# EAGLE board suppport_sharp (EAGLE 6.4)
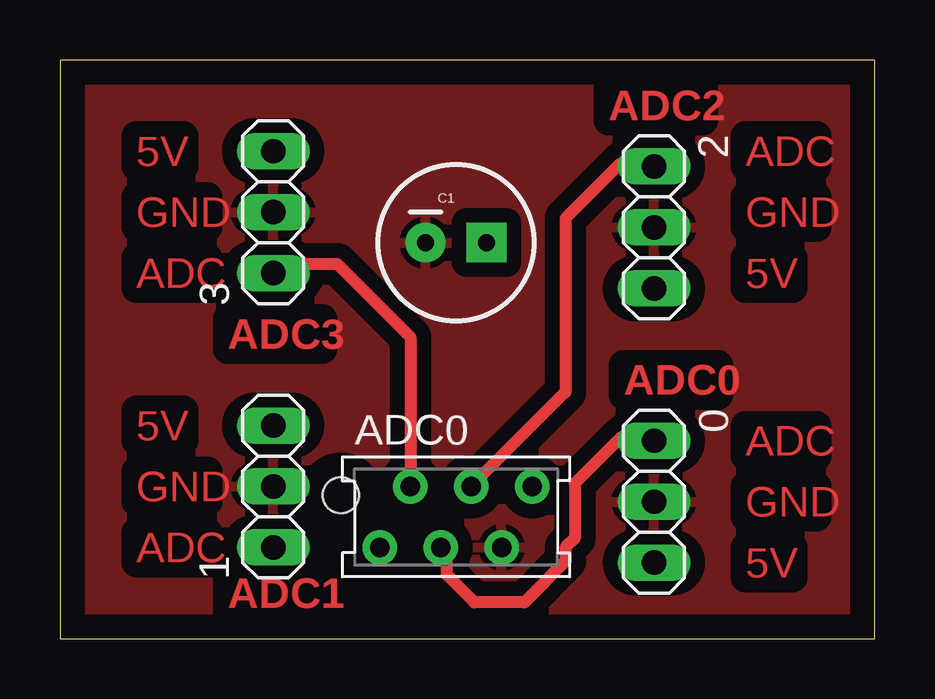
[diagram p0: board, top side]
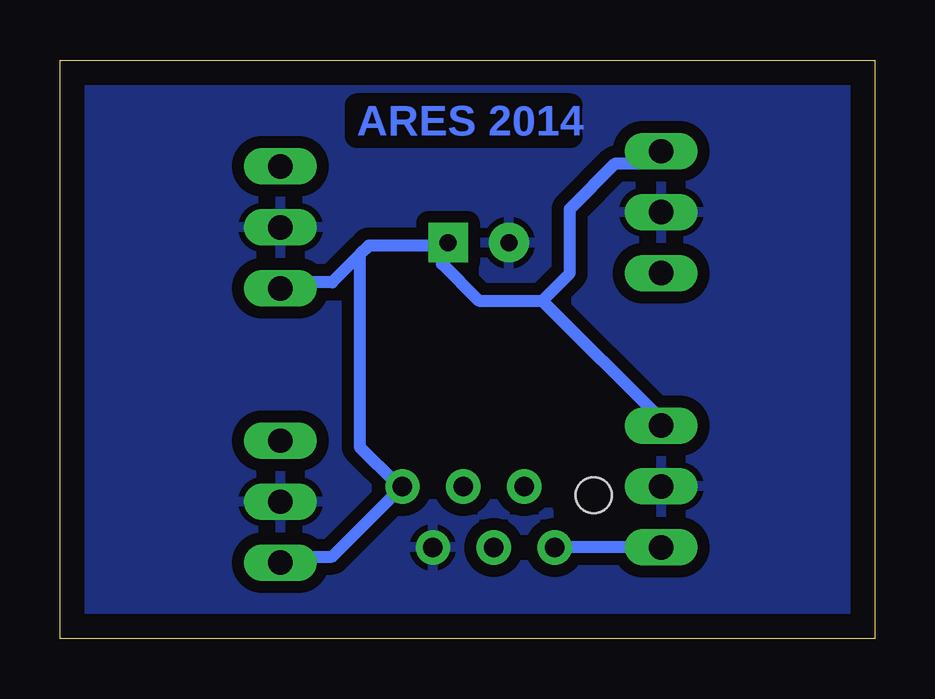
[diagram p1: board, bottom side, seen from below]

Size 33.96 x 24.12 mm. Coordinates in mm from the lower left corner, seen from the top.
Outline: 0,0 33.96,0 33.96,24.12 0,24.12 0,0
Copper layers (1*16): Top 0.1mm / dielectric 1.5mm / Bottom 0.1mm
Design rules "ensea": minimum track width 0.5mm, minimum drill 0.5mm, track to track 0.5mm, track to pad 0.5mm, pad to pad 0.5mm, via to via 0.5mm, smd to smd 8mil, copper to edge 40mil, drill to drill 8mil, minimum pad ring 10mil, minimum via ring 8mil, stop-mask expansion 4mil, vias tented up to drill 0mil, thermal gap 10mil
Net classes: 1 +5V: width 0.6 mm, drill 0.2 mm, clearance 0.4 mm

## Footprints (pad centres in the part's own frame; a part is rotated, then mirrored left to right if it is on the bottom)
1X03 = drill 1.016 long: 1 -2.54,0; 2 0,0; 3 2.54,0
AMP-215079-6 = drill 0.8 pad 1.422: 1 0,0; 2 1.27,2.54; 3 2.54,0; 4 3.81,2.54; 5 5.08,0; 6 6.35,2.54 | hole 1.5: -1.62,2.175
CPOL-RADIAL-100UF-25V = drill 0.7 pad 1.651 square: 1 1.27,0 | drill 0.7 pad 1.651: 2 -1.27,0

## Placement (x,y rotation side)
0  [1X03]  24.77,5.71 270 top
1  [1X03]  8.89,6.35 90 top
2  [1X03]  24.77,17.14 270 top
3  [1X03]  8.89,17.78 90 top
ADC0  MMATCH-6-  [AMP-215079-6]  13.34,3.81 0 top
C1  [CPOL-RADIAL-100UF-25V]  16.51,16.51 0 top

## Library data of the parts
0 1-3 = pinhead
ADC0 = jt-con-micromatch
C1 = SparkFun-Passives

## Nets
ADC_0: 0.1 ADC0.3
ADC_1: 1.1 ADC0.1
ADC_2: 2.1 ADC0.4
ADC_3: 3.1 ADC0.2
GND: 0.2 1.2 2.2 3.2 ADC0.5 C1.2
VCC: 0.3 1.3 2.3 3.3 ADC0.6 C1.1

## Tracks (layer width: path | path; a pad name or v marks a point on that pad's centre or on a via)
ADC_0
  Top 0.5: ADC0.3 16.13,3.81 16.13,2.67 17.27,1.52 19.36,1.52 21.08,3.25 21.08,3.81 21.46,4.19 21.46,6.48 23.37,8.38 24.51,8.38 0.1
ADC_1
  Bottom 0.5: 1.1 ADC0.1
ADC_2
  Top 0.5: ADC0.4 21.08,10.29 21.08,17.53 23.37,19.81 24.51,19.81 2.1
ADC_3
  Top 0.5: ADC0.2 14.61,12.57 11.56,15.62 8.89,15.62 3.1
GND
  pour Bottom: -3.18,27.94 35.56,26.67 32.38,-5.71 -3.81,-5.08
  pour Top (isolate 0.61): -3.81,29.84 -5.71,-6.35 33.66,-6.35 35.56,29.21
VCC
  Bottom 0.5: 0.3 24.51,3.43 22.61,3.43 ADC0.6 19.94,6.48 21.46,8 21.46,16 | 13.84,14.1 8.89,9.14 1.3 | 13.84,14.1 16.51,14.1 18.03,15.62 18.03,16.38 | 13.84,14.1 12.7,15.24 12.7,17.91 10.79,19.81 9.27,19.81 8.89,20.19 3.3 | 21.46,16 21.08,16.38 18.03,16.38 | 21.46,16 22.61,14.86 24.51,14.86 2.3 | 18.03,16.38 C1.1

## Text on the board
Top: ADC2 | 5V | ADC | GND | GND | ADC | 5V | ADC3 | ADC0 | 5V | ADC | GND | GND | ADC | 5V | ADC1
Bottom: ARES 2014